# Altium PCB driver_V1.PcbDoc
Units mm, origin at the board's own origin, x right, y up, seen from the top; angles counter-clockwise.
Board outline 85.2 x 50.2 mm, 2 copper layers (Top Layer, Bottom Layer), stack 1.58 mm thick; 43 components, 21 nets, 112 pads, 22 vias.
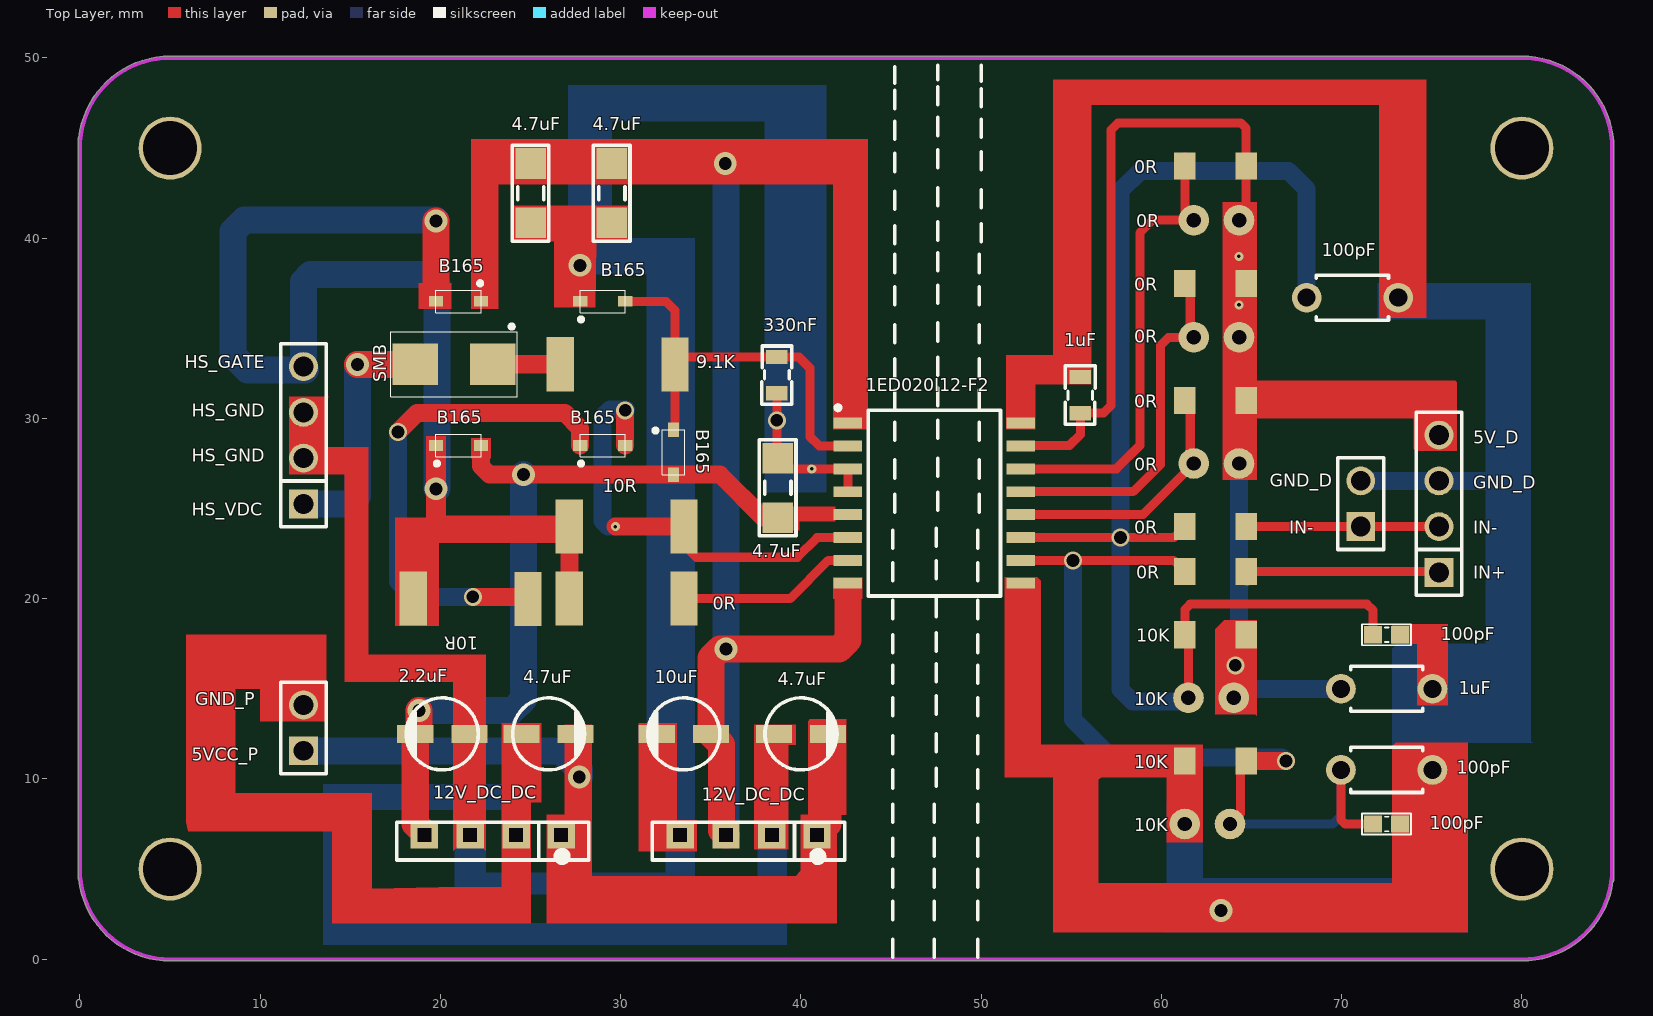
[diagram p0: Top Layer view]
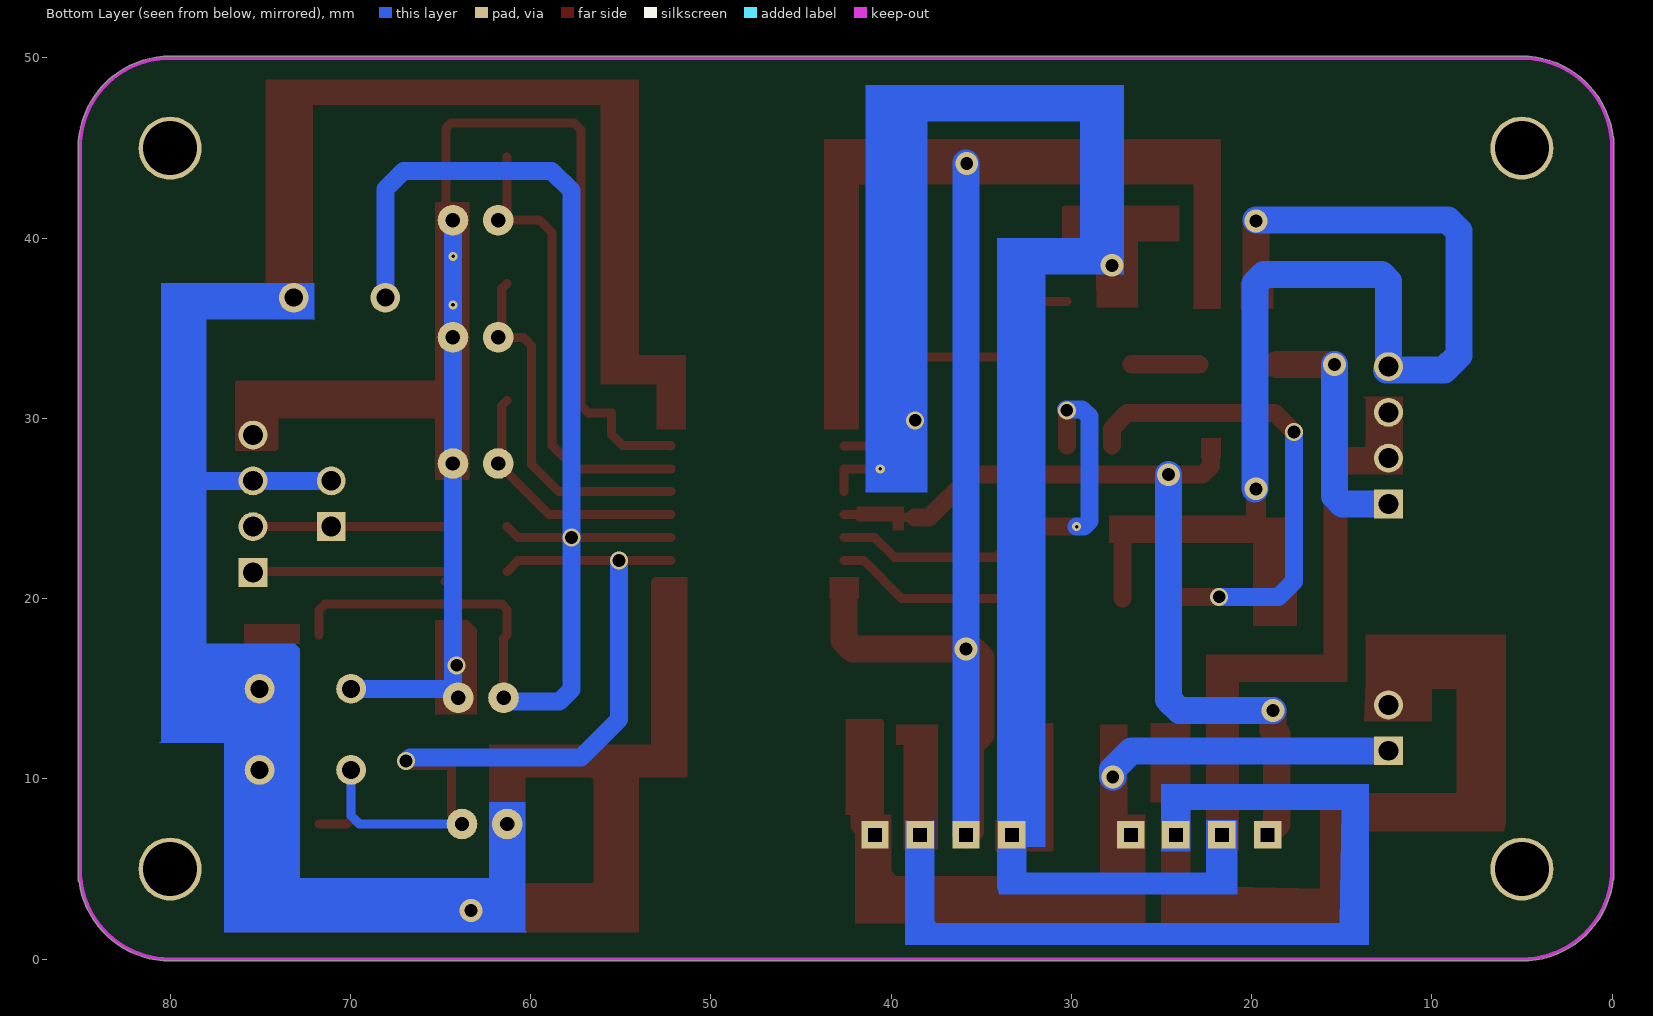
[diagram p1: Bottom Layer view, seen from below]
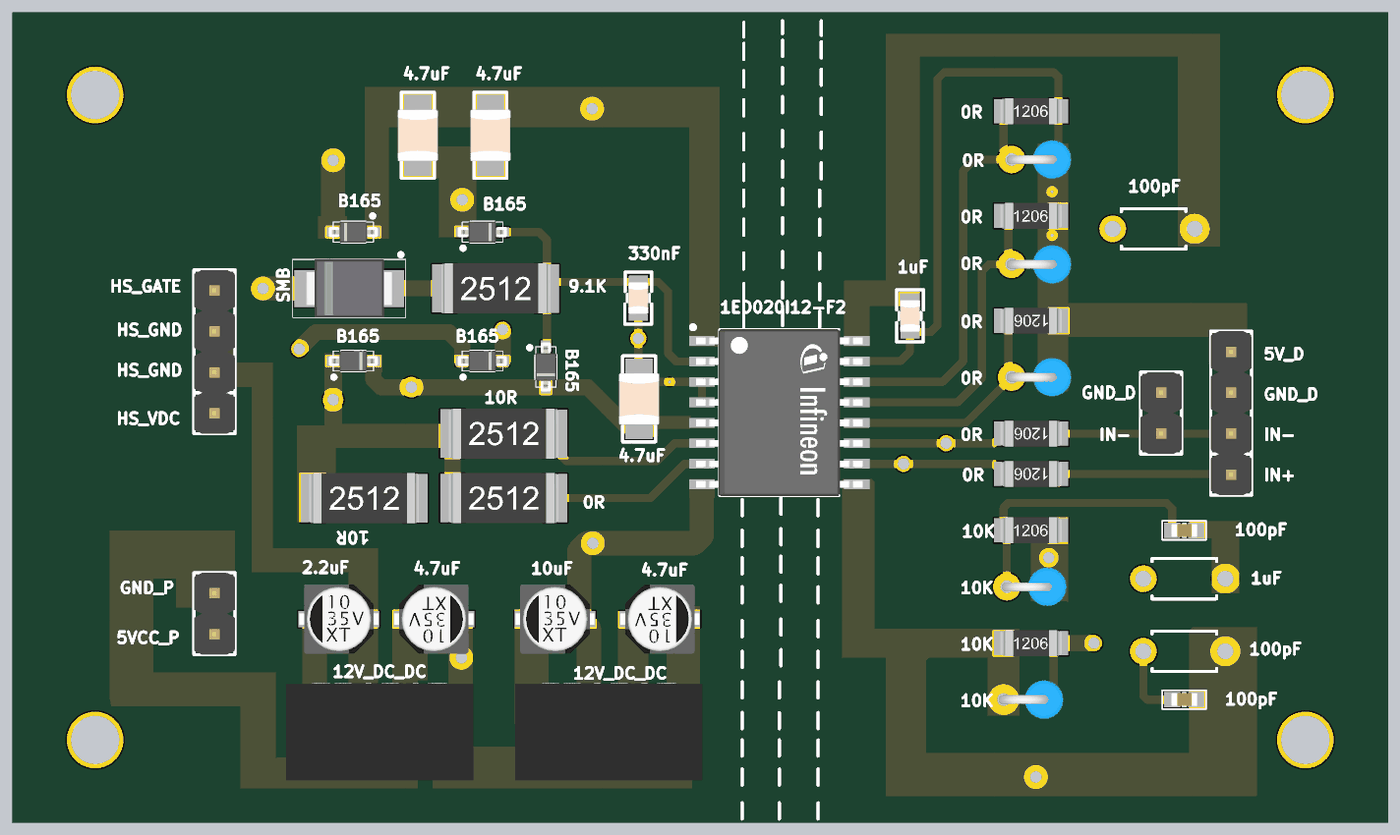
[diagram p2: 3D render of the assembled board from above, using the file's embedded part models]

## Layer stack, top to bottom
Top Solder: solder mask 0.01, Solder Resist, Dk 3.5
Top Layer: signal copper 0.035
Dielectric 1: dielectric 1.51, FR-4, Dk 4.8
Bottom Layer: signal copper 0.035
Bottom Solder: solder mask 0.01, Solder Resist, Dk 3.5

## Board outline
-0.1,44.999 cw(c0,45) -0.1,45 cw(c5,45) -0.1,45.005 -0.1,4.5 ccw(c0,4.5) -0.068,4.426 ccw(c5,5) 5,-0.1 80,-0.1 ccw(c80,5) 85.054,4.316 ccw(c85,4.4) 85.1,4.4 85.1,45 ccw(c80,45) 80,50.1 5,50.1 ccw(c5,45) -0.068,45.574 ccw(c0,45.5)

## Design rules (kind name [scope] priority, off if disabled: settings)
Clearance [All] p1: gap=0.5
PolygonConnect [All] p1: connectstyle=Relief reliefconductorwidth=0.254 reliefentries=4 polygonreliefangle="90 Angle" airgapwidth=0.254
RoutingVias [All] p1: holewidth=0.711 width=1.27 viastyle="Through Hole" minholewidth=0.711 minwidth=1.27 maxholewidth=0.711 maxwidth=1.27
SolderMaskExpansion [All] p1: expansion=0.102
Width [All] p1: maxlimit=2 minlimit=0.5 preferedwidth=1
30 further rules are at their usual default settings.

## Classes and differential pairs
component class driver: 0R 1ED020I12-F2 1uF 2.2uF 4.7uF 5V 5v 9.1K 10K 10R 10uF 12V_DC_DC 100pF 330nF B165 C2 C6 C10 C11 C12 C13 D7 HS_GAte IN+ R4 R5 R6 R7 R8 R10 R12 R13 R14 R15 R16 R17 R19 SMB U4

## Components (designator, comment, footprint, x,y, rotation, side; value= is the part's Value field where it differs from the comment)
0R "0R" RES_2512 30.315,19.8 r0 top
0R "0R" RES_Dung 63.5,41 r0 top
0R "0R" RES_Dung 63.5,27.5 r0 top
0R "0R" RES_Dung 63.5,34.5 r0 top
0R "0R" RES1206 63,44 r0 top
0R "0R" RES1206 63,31 r180 top
0R "0R" RES1206 63,37.5 r0 top
0R "0R" RES1206 63,21.5 r180 top
0R "0R" RES1206 63,24 r180 top
1ED020I12-F2 "1ED020I12-F2" SOIC127P1028X264-16N-1 47.4,25.3 r0 top
1uF "1uF" "Tu 0805_N" 55.5,31.3 r270 top
1uF "" CAPR5.08-4x2.5 72.5,15 r180 top
2.2uF "2.2uF_35V" tu_4x5.4mm 20.1,12.5 r0 top
4.7uF "4.7uF_35V" tu_4x5.4mm 40,12.5 r180 top
4.7uF "4.7uF_35V" tu_4x5.4mm 26,12.5 r180 top
4.7uF "4.7uF" "tu 1206_N" 38.71,26.15 r270 top
4.7uF "4.7uF" "tu 1206_N" 29.5,42.5 r270 top
4.7uF "4.7uF" "tu 1206_N" 25,42.5 r270 top
9.1K "9.1K" RES_2512 29.815,32.8 r0 top
10K "10K" RES_Dung 63.2,14.5 r0 top
10K "10K" RES1206 63,18 r0 top
10K "10K" RES1206 63,11 r0 top
10K "10K" RES_Dung 63,7.5 r0 top
10R "10R" RES_2512 21.666,19.792 r0 top
10R "10R" RES_2512 30.315,23.8 r0 top
10uF "10uF_35V" tu_4x5.4mm 33.5,12.5 r0 top
12V_DC_DC "DC_DC_12V" B0512S/D-1W 22.85,6.6 r0 top
12V_DC_DC "DC_DC_12V" B0512S/D-1W 37.04,6.6 r0 top
100pF "100pF" "Tu 0603" 72.5,18 r180 top
100pF "100pF" "Tu 0603" 72.5,7.5 r180 top
100pF "" CAPR5.08-4x2.5 70.6,36.7 r180 top
100pF "" CAPR5.08-4x2.5 72.5,10.5 r180 top
330nF "33pF" "Tu 0805_N" 38.66,32.41 r90 top (schematic designator 8uF)
B165 "BAT165" BAT165E6327HTSA1TRND 32.93,28.13 r0 top
B165 "BAT165" BAT165E6327HTSA1TRND 21,28.5 r90 top
B165 "BAT165" BAT165E6327HTSA1TRND 29,28.5 r90 top
B165 "BAT165" BAT165E6327HTSA1TRND 21,36.5 r270 top
B165 "BAT165" BAT165E6327HTSA1TRND 29,36.5 r90 top
HS_GATE "JP 1x4 2.54" "JP 1X4 DT_N" 12.4,25.26 r90 top
IN+ "JP 1x4 2.54" "JP 1X4 DT_N" 75.4,21.46 r90 top
JP1 "JP 1x2 2.54" "JP 1x2 DT_n" 12.4,11.56 r90 top
SMB "S3N" SMB 20.75,33 r180 top
? "JP 1x2 2.54" "JP 1x2 DT_n" 71.06,24 r90 top

## Footprints (in the part's own frame and the unit in brackets; to place one, negate y for a bottom-side part, rotate by r counter-clockwise, add the part's x,y. Pads: shape width x height; smd on the part's side, far side on the other; paste and mask are expansions set on the pad)
B0512S/D-1W [mm] "B0512S/D-1W"
  rect 1.52x1.52 hole 0.75 square: 1(3.85,0.3) 2(1.35,0.3) 3(-1.2,0.3) 4(-3.74,0.3)
  silkscreen extent -5.28,-1.12 5.38,1, body extent -6,-4.1 5.6,1.91, height 18
BAT165E6327HTSA1TRND [mm] "BAT165E6327HTSA1TRND"
  rect 0.6x0.8 smd: 1(0,1.25) 2(0,-1.25)
  silkscreen extent -1.1,-1.25 0.63,1.3, body extent -0.71,-1.52 0.71,1.52, height 1.14
CAPR5.08-4x2.5 [mm] "Capacitor, Ceramic, Thru-Hole, Dipped Radial; Body 4 x 2.5 mm (WxT) Pin Spacing 5.08 mm (typ)"
  round 1.65 hole 1: 1(-2.54,0) 2(2.54,0)
  silkscreen extent -2,-1.25 2,1.25
"JP 1x2 DT_n" [mm] "2 pins, 1 row, straight, gold plating"
  rect 1.6x1.6 hole 1.1: 1(0,0)
  round 1.6 hole 1.1: 2(2.54,0)
  silkscreen extent -1.27,-1.27 3.81,1.27, body extent -1.27,-1.27 3.81,1.27, height 8.54
"JP 1X4 DT_N" [mm] "4 pins, 1 row, straight, gold plating"
  rect 1.6x1.6 hole 1.1: 1(0,0)
  round 1.6 hole 1.1: 2(2.54,0) 3(5.08,0) 4(7.62,0)
  silkscreen extent -1.27,-1.27 8.89,1.27, body extent -1.27,-1.27 8.89,1.27, height 8.54
RES1206 [mm]
  rect 1.2x1.5 smd: 1(-1.7,0) 2(1.7,0)
  body extent -1.9,-0.8 1.9,0.8, height 0.6
RES_2512 [mm]
  rect 1.5x3 smd: 1(3.185,0.2)
  rect 1.524x3 smd: 2(-3.166,0.208)
  body extent -3.4,-1.35 3.4,1.75, height 0.6
RES_Dung [mm] "Resistor, Axial; Body 10.0 x 2.8 mm (LxDia. max), Lead Dia. 0.7 mm (max)"
  round 1.7 hole 0.8: 1(-1.7,0) 2(0.807,0)
  body extent -2.01,-1.2 2.01,1.2, height 1.96
SMB [mm] "DO-214"
  rect 2.5x2.3 smd: 1(-2.15,0) 2(2.15,0)
  silkscreen extent -3.5,-2.2 3.5,1.8, body extent -2.7,-1.8 2.7,1.8
SOIC127P1028X264-16N-1 [mm] "SOIC,1.27mm,pitch;16 pin,7.52mm W X 10.34mm L X 2.64mm H body"
  rect 1.6x0.6 smd paste+0 mask+0: 1(-4.8,4.445) 2(-4.8,3.175) 3(-4.8,1.905) 4(-4.8,0.635) 5(-4.8,-0.635) 6(-4.8,-1.905) 7(-4.8,-3.175) 8(-4.8,-4.445) 9(4.8,-4.445) 10(4.8,-3.175) 11(4.8,-1.905) 12(4.8,-0.635) 13(4.8,0.635) 14(4.8,1.905) 15(4.8,3.175) 16(4.8,4.445)
  silkscreen extent -5.47,-5.15 3.68,5.42, body extent -5.16,-5.17 5.16,5.17, height 2.65
"Tu 0603" [mm] "Chip Capacitor, 2-Leads, Body 1,60x0,80mm, IPC Medium Density"
  rect 1x0.95 smd mask+0.076: 1(-0.75,0) 2(0.75,0)
  silkscreen extent -1.35,-0.58 1.37,0.58, body extent -0.8,-0.4 0.8,0.4, height 0.9
"Tu 0805_N" [mm] "Compoment SMD 80x50mil"
  rect 0.8x1.2 smd: 1(-1,-0.003) 2(1,0)
  silkscreen extent -1.62,-0.83 1.61,0.83, body extent -1,-0.62 1,0.63, height 1.26
"tu 1206_N" [mm]
  rect 1.7x1.7 smd: 1(-1.65,0) 2(1.65,0)
  silkscreen extent -2.67,-1.02 2.67,1.02, body extent -1.6,-1.25 1.6,1.25, height 2.01
tu_4x5.4mm [mm]
  rect 2x1 smd: 1(-1.5,0) 2(1.5,0)
  silkscreen extent -2,-2 2,2, body extent -2.45,-2.15 2.45,2.15, height 5.4

## Part data
0R 0R 0R 0R 0R 0R 0R 0R 0R 9.1K 10K 10K 10K 10K 10R 10R: library part 311-0.0GRTR-ND
1ED020I12-F2: "Single IGBT Driver IC"
1uF 330nF: library part cap_0805
1uF 100pF 100pF: library part Cap_gom, "Capacitor"
2.2uF 4.7uF 4.7uF 10uF: library part capacitor_electric, "capacitor_electric"
4.7uF 4.7uF 4.7uF: library part cap_1210
12V_DC_DC 12V_DC_DC: library part DC_DC_12v
100pF 100pF: library part cap_0603
HS_GATE IN+: library part "JP 1x4 2.54 Duc Thang", "C?m"
JP1 ?: library part "JP 1x2 2.54 Duc Thang", "C?m"
SMB: library part S3A-S3N

## Free pads (board coordinates)
  round 3.5 hole 3: 2(5,5) 2(5,45) 2(80,5) 2(80,45)

## Via types
v1: diameter 1.27, hole 0.72, Top Layer to Bottom Layer, 10 vias
v2: diameter 1, hole 0.72, Top Layer to Bottom Layer, 4 vias
v3: diameter 0.5, hole 0.2, Top Layer to Bottom Layer, 4 vias
v4: diameter 1, hole 0.7, Top Layer to Bottom Layer, 4 vias

## Nets (pads, with @x,y where several pads share a name; then routed paths per layer and width w, separated by ;. In a path a pad name is that pad's centre, name@x,y a point inside that pad or via, vN(x,y) a via of type N, cw(c..) or ccw(c..) an arc to the next point about the centre after c; other vN are vias at no path point)
5V: 0R.1@64.7,31 0R.2@64.7,37.5 0R.2@64.7,44 0R.2@64.307,27.5 0R.2@64.307,34.5 0R.2@64.307,41 1ED020I12-F2.15 1uF.2 10K.2@64.007,14.5 10K.2@64.7,18 IN+.4 | length 90.2
  Top Layer w0.5: 1ED020I12-F2.15 52.225,28.5 54.9,28.5 55.5,29.1 55.5,30.3 56.786,30.3 57.2,30.714 57.2,46 57.6,46.4 64.4,46.4 64.7,46.1 64.7,44 64.7,41.393 0R.2@64.307,41 ; 0R.2@64.307,34.5 64.7,34.893 0R.2@64.7,37.5
  Top Layer w1: 10K.2@64.007,14.5 64.7,15.193 10K.2@64.7,18 ; 0R.2@64.307,27.5 64.7,27.893 64.7,31 74.8,31 75.4,30.4 IN+.4
  Bottom Layer w1: 10K.2@64.007,14.5 10K.2@64.307,14.8 ; 0R.2@64.307,41 v3(64.307,36.3) 64.307,34.5 64.307,27.5 10K.2@64.307,14.8 ; 1uF.2@69.96,15 64.507,15 10K.2@64.307,14.8
  other v3: 64.3,39
  other v4: 64.1,16.3
12V: 1ED020I12-F2.5 2.2uF.1 4.7uF.2@38.71,24.5 12V_DC_DC.4@19.11,6.9 B165.2@22.25,28.5 B165.2@32.93,26.88 | length 47.8
  Top Layer w0.5: 4.7uF.2@38.71,24.5 39.6,24.5 39.765,24.665 1ED020I12-F2.5
  Top Layer w1: 22.25,27.95 22.25,27.35 22.72,26.88 v1(24.6,26.88) 32.93,26.88 35.52,26.88 37.9,24.5 4.7uF.2@38.71,24.5
  Top Layer w1.5: v1(18.8,13.8) 18.8,12.7 2.2uF.1 18.6,7.51 12V_DC_DC.4@19.11,7
  Bottom Layer w1.5: v1(18.8,13.8) 24,13.8 24.6,14.4 v1(24.6,26.88)
-5V: 1ED020I12-F2.1 1ED020I12-F2.8 4.7uF.1@25,44.15 4.7uF.1@29.5,44.15 10uF.2 12V_DC_DC.3@35.84,6.9 B165.1@22.25,36.5 | length 98.5
  Top Layer w1: 22.25,37.125 22.25,43.25 23.15,44.15 25,44.15 29.5,44.15 v1(35.8,44.15) 41.65,44.15 42.8,43 42.8,30.1
  Top Layer w1.5: 12V_DC_DC.3@35.84,6.9 35.6,7.14 35.6,11.9 10uF.2 35,16.7 35.5,17.2 v1(35.84,17.2) 42.1,17.2 42.6,17.7 42.6,20.4
  Bottom Layer w1.5: 12V_DC_DC.3@35.84,6.95 v1(35.84,17.2) v1@35.84,44.16
GND_D: 1ED020I12-F2.9 1ED020I12-F2.16 1uF.1 10K.1@61.3,7.5 10K.1@61.3,11 100pF.1 ?.2 IN+.3 | length 155.8
  Top Layer w0.5: 1ED020I12-F2.9 52.2,12.3 53.5,11 55.3,11 ; 1ED020I12-F2.16 52.2,31.9 52.6,32.3 55.497,32.3 55.497,47.497 56.5,48.5 71.8,48.5 73.14,47.16 100pF.1@73.14,36.7 ; 10K.1@61.3,7.5 61.3,11 55.3,11 ; 100pF.1@73.25,7.5 74.035,7.5 ; 100pF.1@73.25,18 74.5,18 75.04,17.46 1uF.1@75.04,15 ; 100pF.1@75.04,10.5 75.04,7.72 74.82,7.5 74.035,7.5 ; 55.3,11 55.3,3 55.6,2.7 v1(63.3,2.7) 73.6,2.7 74.1,3.2 74.1,7.435 74.035,7.5
  Bottom Layer w1: ?.2@71,26.6 ?.2 IN+.3 79.16,26.54 79.2,26.5 ; 100pF.1@73.14,36.7 78.3,36.7 79.2,35.8 79.2,26.5 ; 100pF.1@75.04,10.5 75.04,15 78.3,15 79.2,15.9 79.2,26.5
GND_P: 4.7uF.2@24.5,12.5 4.7uF.2@38.5,12.5 12V_DC_DC.2 JP1.2 | length 101.7
  Top Layer w0.5: JP1.2 12.4,16.2 12.02,16.58 7.58,16.58 6.7,15.7 6.7,9.6 8,8.3 14.3,8.3 14.9,7.7 14.9,3.4 15.8,2.5 24,2.5 24.5,3 12V_DC_DC.2@24.5,7.2 ; 12V_DC_DC.2@24.2,6.9 24.2,12.2 4.7uF.2@24.5,12.5 ; 12V_DC_DC.2@38.39,6.9 38.5,7.01 4.7uF.2@38.5,12.5
  Bottom Layer w1: 12V_DC_DC.2@24.2,6.9 24.2,8.2 23.2,9.2 14.6,9.2 14,8.6 14,2.4 15,1.4 37.6,1.4 38.4,2.2 38.4,6.89 12V_DC_DC.2@38.39,6.9
HS_GATE: 0R.2@27.149,20.008 10R.2 B165.1@19.75,28.5 B165.2@19.75,36.5 HS_GATE.4 | length 71.1
  Top Layer w1: 10R.2@18.5,20 18.5,23 19.75,24.25 ; B165.1@19.75,28.5 v1(19.75,26.1) 19.75,24.25 ; 0R.2@27.149,20.008 27.149,24.008 19.992,24.008 19.75,24.25
  Top Layer w1.5: 19.75,37 v1(19.75,40.95)
  Bottom Layer w1.5: HS_GATE.4 12.4,37.6 12.8,38 19.3,38 19.8,37.5 v1@19.8,26.1 ; HS_GATE.4@12.5,32.7 9.3,32.7 8.5,33.5 8.5,40.4 9.1,41 v1@19.75,41
HS_GND: 1ED020I12-F2.3 1ED020I12-F2.4 2.2uF.2 4.7uF.1@38.71,27.8 4.7uF.2@25,40.85 4.7uF.2@29.5,40.85 10uF.1 12V_DC_DC.3@21.65,6.9 12V_DC_DC.4@33.3,6.9 330nF.1 B165.1@27.75,36.5 HS_GATE.2 HS_GATE.3 | length 117.5
  Top Layer w0.5: 4.7uF.2@25,40.85 27.9,40.85 ; B165.1@27.75,36.5 v1(27.75,38.5) 27.75,40.7 27.9,40.85 ; 4.7uF.2@29.5,40.85 27.9,40.85 ; 10uF.1 32,8.2 12V_DC_DC.4@33.3,6.9 ; 330nF.1 v4(38.663,29.9) 38.663,27.847 38.71,27.8 39.305,27.205 1ED020I12-F2.3 1ED020I12-F2.4
  Bottom Layer w1: 12V_DC_DC.3@21.65,6.9 21.65,4.85 22.3,4.2 32.7,4.2 33.3,4.8 33.3,6.9 33.3,37.2 32,38.5 v1(27.75,38.5) 27.75,46.25 29.4,47.9 40,47.9 40.9,47 40.9,30.9 39.9,29.9 v4(38.663,29.9)
  other v3: 40.6,27.2
HS_HV_VDC: HS_GATE.1 SMB.2 | length 13.7
  Top Layer w1.5: v1(15.4,33) SMB.2
  Bottom Layer w1.5: HS_GATE.1 14.96,25.26 15.4,25.7 v1(15.4,33)
Net0R_1: 0R.1@61.8,27.5 0R.2@61.3,31 1ED020I12-F2.12 | length 14.5
  Top Layer w0.5: 1ED020I12-F2.12 58.965,24.665 61.8,27.5 61.6,27.7 61.6,30.7 0R.2@61.3,31
Net0R_1: 0R.1@61.3,44 0R.1@61.8,41 1ED020I12-F2.14 | length 25.9
  Top Layer w0.5: 1ED020I12-F2.14 57.505,27.205 58.8,28.5 58.8,40.3 59.5,41 61.8,41 61.3,41.5 61.3,44 0R.1@61.3,44.5
Net0R_1: 0R.1@61.3,37.5 0R.1@61.8,34.5 1ED020I12-F2.13 | length 20.2
  Top Layer w0.5: 1ED020I12-F2.13 58.435,25.935 59.95,27.45 59.95,34.05 60.4,34.5 61.8,34.5 61.6,34.7 61.6,37.2 0R.1@61.3,37.5
Net0R_1: 0R.1@33.5,20 1ED020I12-F2.7 | length 10
  Top Layer w0.5: 0R.1@33.5,20 39.4,20 41.525,22.125 1ED020I12-F2.7
Net0R_1: 0R.1@64.7,21.5 IN+.1 | length 10.8
  Top Layer w0.5: 0R.1@64.7,21 0R.1@64.74,20.96 ; 0R.1@64.7,21.5 75.36,21.5 IN+.1
Net0R_2: 0R.2@61.3,21.5 1ED020I12-F2.10 10K.2@63.807,7.5 10K.2@64.7,11 100pF.2@69.96,10.5 100pF.2@71.75,7.5 | length 50.5
  Top Layer w0.5: 1ED020I12-F2.10 v2(55.1,22.125) 60.675,22.125 0R.2@61.3,21.5 ; 10K.2@63.807,7.5 64.4,8.093 64.4,10.7 10K.2@64.7,11 ; 100pF.2@69.96,10.5 69.96,7.74 70.2,7.5 100pF.2@71.75,7.5
  Top Layer w1: 10K.2@64.7,11 v2(66.9,11)
  Bottom Layer w0.5: 10K.2@63.807,7.5 69.5,7.5 69.96,7.96 100pF.2@69.96,10.5
  Bottom Layer w1: v2(55.1,22.125) 55.1,13.3 57.2,11.2 66.7,11.2 v2(66.9,11)
Net0R_2: 0R.2@61.3,24 1ED020I12-F2.11 10K.1@61.3,18 10K.1@61.5,14.5 100pF.2@68.06,36.7 100pF.2@71.75,18 | length 75.4
  Top Layer w0.5: 1ED020I12-F2.11 60.695,23.395 0R.2@61.3,24 ; 10K.1@61.5,14.5 61.5,17.8 61.3,18 61.3,19.4 61.6,19.7 71.4,19.7 71.75,19.35 100pF.2@71.75,18
  Bottom Layer w1: 10K.1@61.5,14.5 61.3,14.3 58.4,14.3 57.74,14.96 v2(57.74,23.4) 57.74,42.64 58.84,43.74 67.06,43.74 68.06,42.74 100pF.2@68.06,36.7
Net1ED020I12-F2_2: 1ED020I12-F2.2 9.1K.1 330nF.2 B165.1@32.93,29.38 B165.2@30.25,36.5 | length 23.6
  Top Layer w0.5: B165.2@30.25,36.5 32.5,36.5 33,36 9.1K.1 ; B165.1@32.93,29.38 33,29.45 9.1K.1 ; 1ED020I12-F2.2 41.025,28.475 40.5,29 40.5,32.8 39.89,33.41 330nF.2 33.41,33.41 9.1K.1
Net1ED020I12-F2_6: 1ED020I12-F2.6 10R.1@33.5,24 B165.2@30.25,28.5 | length 24.7
  Top Layer w0.5: 10R.1@33.5,24 33.5,23 34.2,22.3 39.8,22.3 40.895,23.395 1ED020I12-F2.6
  Top Layer w1: v3(29.7,24) 10R.1@33.5,24 ; B165.2@30.25,28.5 v4(30.25,30.45)
  Bottom Layer w1: v3(29.7,24) 29.3,24 29,24.3 29,30.1 29.4,30.5 v4@30.3,30.5
Net9.1K_2: 9.1K.2 SMB.1 | length 3.8
  Top Layer w1: SMB.1 22.908,33.008 9.1K.2
Net10R_1: 10R.1@24.851,19.992 B165.1@27.75,28.5 | length 27.7
  Top Layer w0.5: 10R.1@24.743,20.1 10R.1@24.851,19.992
  Top Layer w1: v2(17.649,29.249) 18.7,30.3 26.9,30.3 27.75,29.45 B165.1@27.75,28.5 ; v4(21.8,20.1) 10R.1@24.743,20.1
  Bottom Layer w1: v2(17.649,29.249) 17.649,20.951 18.5,20.1 v4(21.8,20.1)
Net_1: 0R.1@64.7,24 ?.1 IN+.2 | length 10.9
  Top Layer w0.5: 0R.1@64.7,24 70.5,24 ?.1@71,23.5 ; ?.1 IN+.2
  Bottom Layer w0.5: IN+.2@75.34,24.06 IN+.2
VCC_5V: 4.7uF.1@27.5,12.5 4.7uF.1@41.5,12.5 12V_DC_DC.1 JP1.1 | length 47
  Top Layer w1: 4.7uF.1@27.5,12.5 27.5,7.7 26.7,6.9 26.7,5.1 28,3.8 39.9,3.8 40.89,4.79 40.89,6.9 12V_DC_DC.1@41.5,7.51
  Top Layer w1.5: 12V_DC_DC.1@41.5,7.51 4.7uF.1@41.5,12.5
  Bottom Layer w1.5: JP1.1 26.66,11.56 27.7,10.52 v1(27.7,10.1)

## Keep-outs
Keep-Out Layer:
  lines w0.2: 0,4.5 0,45.5 ; 0,5 ccw(c5,5) 5,0 73.3,0 80,0 ccw(c80,5) 85,5 ; 0,45 cw(c5,45) 5,50 80,50 cw(c80,45) 85,45 85,4.4

## Other copper
Top Layer:
  region net GND_D: 51.3,21.2 53.1,21.2 53.3,21 53.3,11.9 62,11.9 62.3,11.9 62.3,10.5 62.3,10.1 51.3,10.1 51.3,10.5 51.3,10.6 51.3,10.7
  region net GND_D: 54,10.1 54,1.5 77,1.5 77,5.4 75.8,4.2 56.5,4.2 56.5,9.95 56.65,10.1
  region net GND_D: 60.3,10.1 62.3,10.1 62.3,6.5 60.3,6.5
  region net GND_D: 72.8,8.084 73.8,8.084 73.8,4.2 72.8,4.2
  region net GND_D: 77,12 73,12 72.8,11.8 72.8,4.2 77,4.2
  region net 5V: 65.2,42 65.3,42 65.3,41.9 65.3,26.6 63.4,26.6 63.4,26.7 63.4,42
  region net 5V: 65.3,18.8 63.5,18.8 63,18.3 63,13.6 65.2,13.6 65.3,13.5
  region net GND_D: 51.4,29.4 53,29.4 53,31.9 56.1,31.9 56.1,33.2 56.1,47.4 64.1,47.4 72.1,47.4 72.1,35.6 74.7,35.6 74.7,48.8 54,48.8 54,40.9 54,33.5 51.4,33.5 51.4,32
  region net GND_D: 72.8,18.584 72.8,17.5 74.2,17.5 74.2,14.206 74.2,14.1 75.04,14.1 75.9,14.1 75.9,18.584
  region net GND_P: 10,13.2 13.75,13.2 13.67,15.37 13.67,13.2 13.67,18 11.35,18 5.9,18 5.9,10.6 5.9,7.6 6,7.1 10,7.1 14,7.1 14,2 15.5,2 17,2 25,2 25,7.6 25,7.7 23.4,7.7 23.4,4 19.9,4 16.2,3.9 16.2,9.2 8.6,9.2 8.6,14.2 8.6,15 10,15
  region net HS_GND: 13.8,31.2 13.67,31.07 13.67,28.4 16,28.4 16,16.9 22.525,16.9 22.525,6.025 21.659,6.891 20.7,6.025 20.7,15.4 14.7,15.4 14.7,26.9 11.6,26.9 11.6,31.2
  region net -5V: 41.8,30.5 43.6,30.5 43.6,29.54 43.64,29.5 43.54,29.4 41.8,29.4
  region net HS_GATE: 19.2,36.1 20.3,36.1 20.3,37.3 19.2,37.3
  region net -5V: 21.7,36.1 22.8,36.1 22.8,37.3 21.7,37.3
  region net -5V: 41.8,21.2 43.4,21.2 43.4,20 41.8,20
  region net HS_GND: 31,13.1 33.1,13.1 33.1,7.718 34.212,7.718 34.212,6 31.4,6 31,6
  region net GND_P: 37.4,13 37.4,6.1 39.3,6.1 39.3,11.9 39.7,11.9 39.7,13
  region net GND_P: 23.4,13.1 25.6,13.1 25.6,8.7 25,8.7 25,7.7 25,6.1 23.4,6.1
  region net 12V: 41.9,25 41.9,25.1 41.8,25.1 39.3,25.1 39.3,23.8 39.9,23.8 39.9,24.1 39.9,24.3 40.1,24.3 41.9,24.3
  region net 5V: 74,30 74,28.33 74.13,28.2 76.4,28.2 76.4,32 76.3,32.1 65.3,32.1 65.3,30
  region net 12V: 22.8,28.9 22.8,27.8 21.7,27.8 21.7,28.9
  region net HS_GATE: 20.3,29 20.3,27.9 19.2,27.9 19.2,29
  region net HS_GATE: 19.2,29 19.2,24.5 17.5,24.5 17.5,18.5 19.9,18.5 19.9,23.1 27.9,23.1 27.9,24.6 20.3,24.6 20.3,29
  region net HS_GND: 30.4,41.8 30.5,41.7 30.5,39.833 28.633,39.833 28.6,36.183 27.783,36.183 26.3,36.183 26.3,39.833 24.133,39.833 24,39.833 24,41.8
  region net VCC_5V: 25.9,8 25.9,6.1 27.6,6.1 27.8,6.1 28.4,6.1 28.4,13 26.9,13 26.9,8
  region net VCC_5V: 25.9,6.1 25.9,2 42,2 42,8 40,8 40,4.9 39.7,4.6 28.4,4.6 28.4,6.1
  region net VCC_5V: 42.5,13.3 40.5,13.3 40.4,13.2 40.4,8 42.5,8
  region net -5V: 41.8,43 23.2,43 23.2,36.1 21.7,36.1 21.7,45.5 43.7,45.5 43.7,29.4 41.8,29.4
  region net HS_GATE: 20.6,36.1 18.9,36.1 18.8,36.1 18.8,36.2 18.8,37.5 20.6,37.5
Bottom Layer:
  region net GND_D: 60.3,1.6 60.2,1.5 77,1.5 77,12 72.8,12 72.8,11.7 72.8,4.5 62.3,4.5 62.3,4.6 62.3,4.7 62.3,8.7 60.3,8.7
  region net GND_D: 72.8,12 72.8,17.216 73.084,17.5 80.5,17.5 80.5,12.1 80.6,12
  region net GND_D: 72,37.5 80.5,37.5 80.5,17.5 78,17.5 78,35.5 72.05,35.5 72,35.45
  region net GND_P: 23.4,6 25,6 25,9.7 13.5,9.7 13.5,0.8 38.957,0.8 39,0.8 39.2,0.8 39.2,7.7 38.3,7.5 37.6,7.7 37.6,2 37.3,2 15.1,2 15,8.3 15.1,8.3 17.1,8.3 23.4,8.3
  region net HS_GND: 22.5,7.7 22.5,6.1 22.5,4.8 27.5,4.8 32.5,4.8 32.5,7.7 34.1,7.7 34.1,5.8 34.1,4 34,3.6 27.3,3.6 20.8,3.6 20.8,6.1 20.8,7.7
  region net HS_GND: 32.5,6.25 31.45,6.25 31.45,38 27.1,38 27.1,48.5 41.4,48.5 41.4,25.9 37.999,25.9 37.999,46.5 29.5,46.5 29.5,40 34.1,40 34.1,6.2

## Silkscreen, mask and mechanical layers (free items; w line width, h text height)
Top Overlay:
  lines w0.2: 45.1,0.1 45.1,1.1 ; 45.1,2.2 45.1,3.2 ; 45.1,4 45.1,5 ; 45.1,5.7 45.1,6.7 ; 45.1,7.6 45.1,8.6 ; 45.1,9.5 45.1,10.5 ; 45.1,11.4 45.1,12.4 ; 45.1,13.5 45.1,14.5 ; 45.1,15.3 45.1,16.3 ; 45.1,17 45.1,18 ; 45.1,18.9 45.1,19.9 ; 45.1,21 45.1,22 ; 45.1,22.8 45.1,23.8 ; 45.2,24.8 45.2,25.8 ; 45.2,26.7 45.2,27.7 ; 45.2,28.8 45.2,29.8 ; 45.2,30.6 45.2,31.6 ; 45.2,32.3 45.2,33.3 ; 45.2,34.2 45.2,35.2 ; 45.2,36.3 45.2,37.3 ; 45.2,38.1 45.2,39.1 ; 45.2,39.7 45.2,40.7 ; 45.2,41.6 45.2,42.6 ; 45.2,43.7 45.2,44.7 ; 45.2,45.5 45.2,46.5 ; 45.2,47.2 45.2,48.2 ; 45.2,48.6 45.2,49.5 ; 47.4,0.1 47.4,1.1 ; 47.4,2.2 47.4,3.2 ; 47.4,4 47.4,5 ; 47.4,5.7 47.4,6.7 ; 47.4,7.6 47.4,8.6 ; 47.5,9.6 47.5,10.6 ; 47.5,11.5 47.5,12.5 ; 47.5,13.6 47.5,14.6 ; 47.5,15.4 47.5,16.4 ; 47.5,17.1 47.5,18.1 ; 47.5,19 47.5,20 ; 47.5,21.1 47.5,22.1 ; 47.5,22.9 47.5,23.9 ; 47.6,24.9 47.6,25.9 ; 47.6,26.8 47.6,27.8 ; 47.6,28.9 47.6,29.9 ; 47.6,30.7 47.6,31.7 ; 47.6,32.4 47.6,33.4 ; 47.6,34.3 47.6,35.3 ; 47.6,36.4 47.6,37.4 ; 47.6,38.2 47.6,39.2 ; 47.6,39.9 47.6,40.9 ; 47.6,41.8 47.6,42.8 ; 47.6,43.9 47.6,44.9 ; 47.6,45.7 47.6,46.7 ; 47.6,47.4 47.6,48.4 ; 47.6,48.8 47.6,49.6 ; 49.8,0.1 49.8,1.1 ; 49.8,2.2 49.8,3.2 ; 49.8,4 49.8,5 ; 49.8,5.7 49.8,6.7 ; 49.8,7.6 49.8,8.6 ; 49.8,9.5 49.8,10.5 ; 49.8,11.4 49.8,12.4 ; 49.8,13.5 49.8,14.5 ; 49.8,15.3 49.8,16.3 ; 49.8,17 49.8,18 ; 49.8,18.9 49.8,19.9 ; 49.8,21 49.8,22 ; 49.8,22.8 49.8,23.8 ; 49.9,24.8 49.9,25.8 ; 49.9,26.7 49.9,27.7 ; 49.9,28.8 49.9,29.8 ; 49.9,30.6 49.9,31.6 ; 49.9,32.3 49.9,33.3 ; 49.9,34.2 49.9,35.2 ; 49.9,36.3 49.9,37.3 ; 49.9,38.1 49.9,39.1 ; 50,39.8 50,40.8 ; 50,41.7 50,42.7 ; 50,43.8 50,44.8 ; 50,45.6 50,46.6 ; 50,47.3 50,48.3 ; 50,48.7 50,49.6
  text "HS_GND" at 6.2,30.1 h0.7
  text "5V_D" at 77.3,28.6 h0.7
  text "HS_GND" at 6.2,27.6 h0.7
  text "GND_D" at 66,26.2 h0.7
  text "GND_D" at 77.3,26.1 h0.7
  text "HS_VDC" at 6.2,24.6 h0.7
  text "IN-" at 67.1,23.6 h0.7
  text "IN-" at 77.3,23.6 h0.7
  text "GND_P" at 6.4,14.1 h0.7
  text "5VCC_P" at 6.2,11 h0.7